# Altium PCB GripperTopBoard.PcbDoc
Units mm, origin at the board's own origin, x right, y up, seen from the top; angles counter-clockwise.
Board outline 79.5 x 85 mm, 2 copper layers (Top Layer, Bottom Layer), stack 1.448 mm thick; 36 components, 15 nets, 87 pads, 103 vias.
Unrouted connection lines stored in the file: 53.
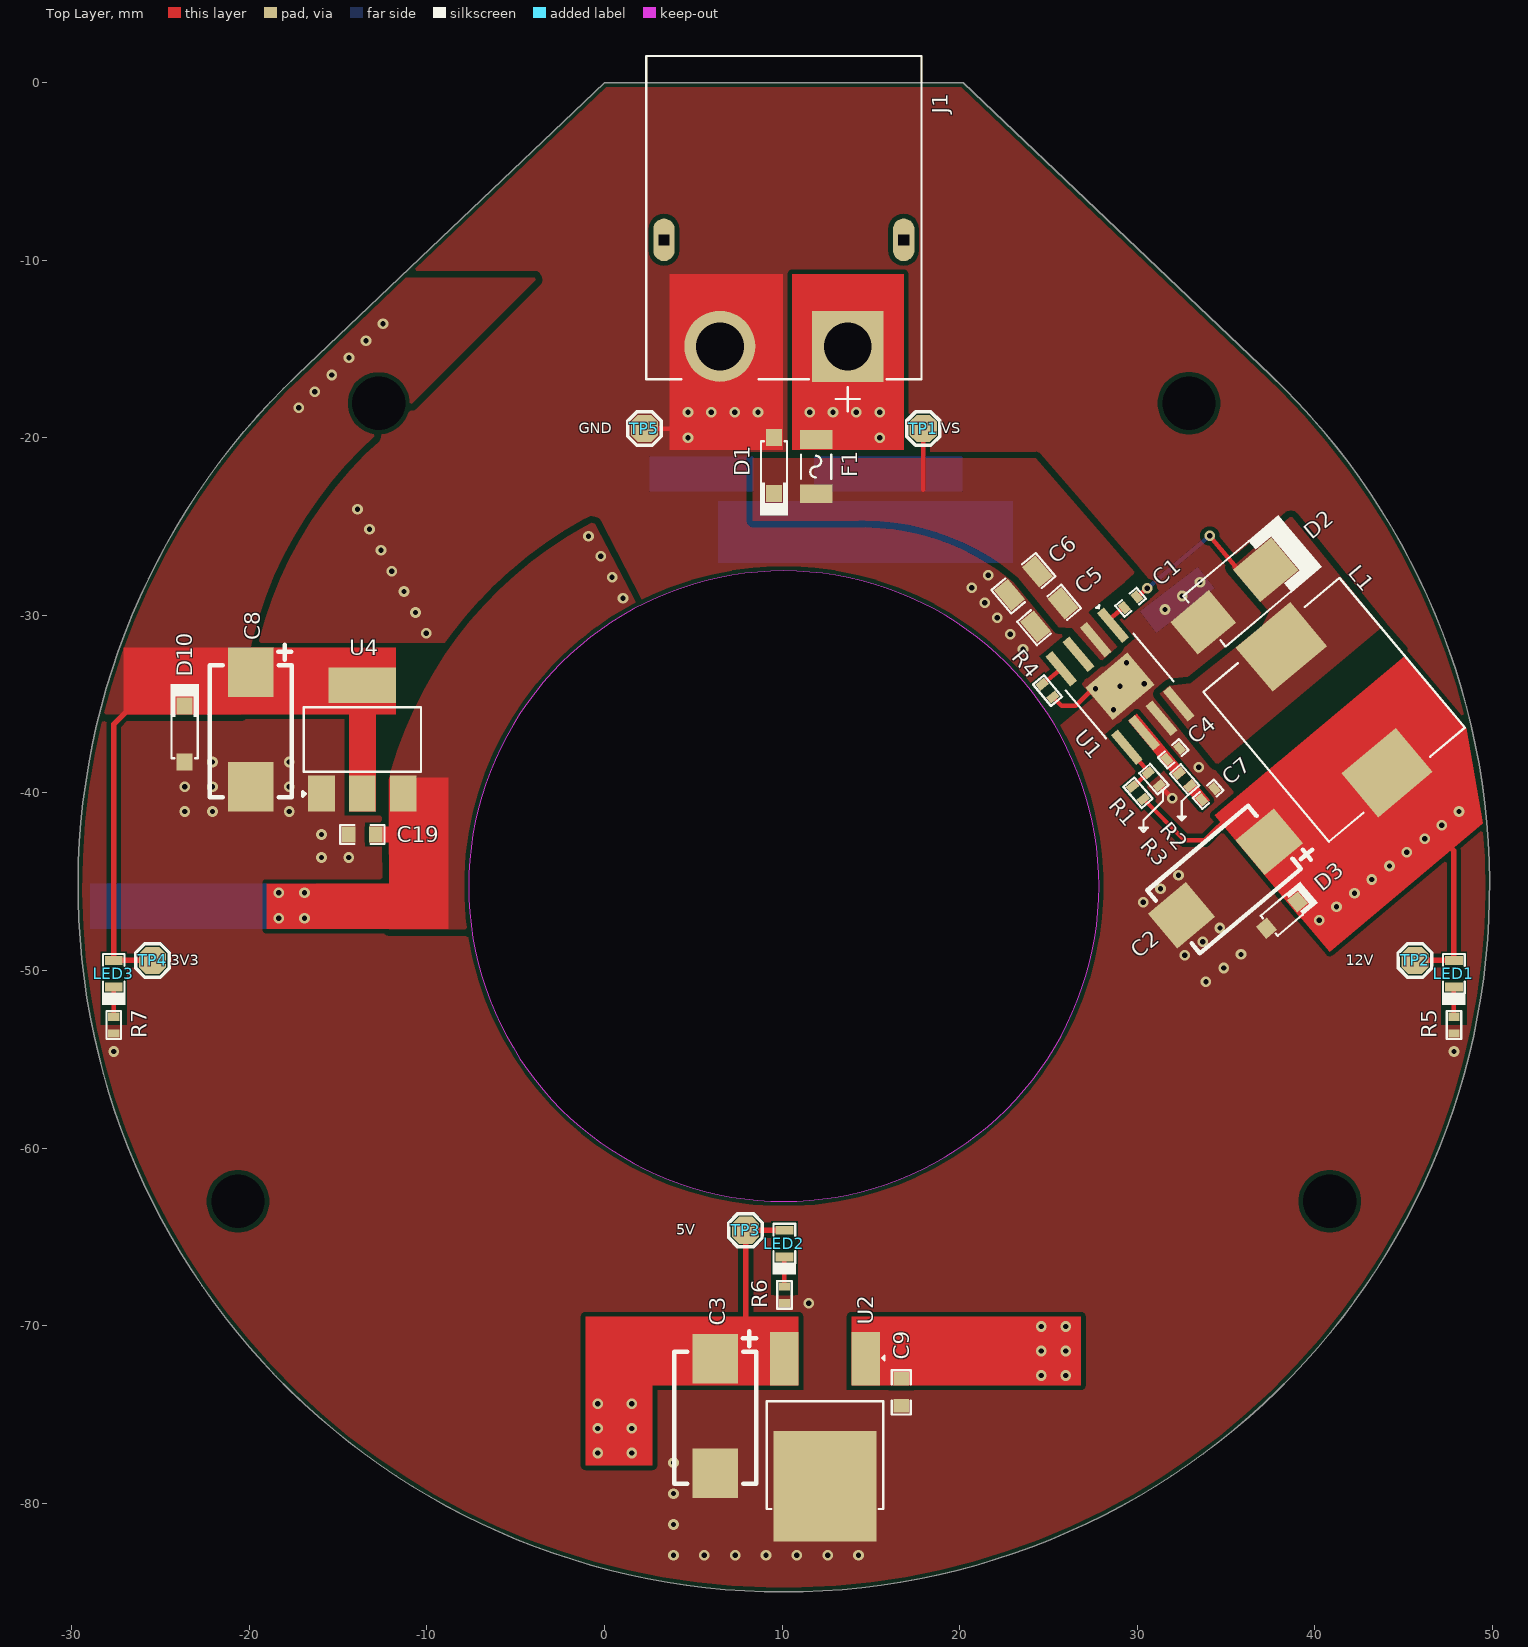
[diagram p0: Top Layer view]
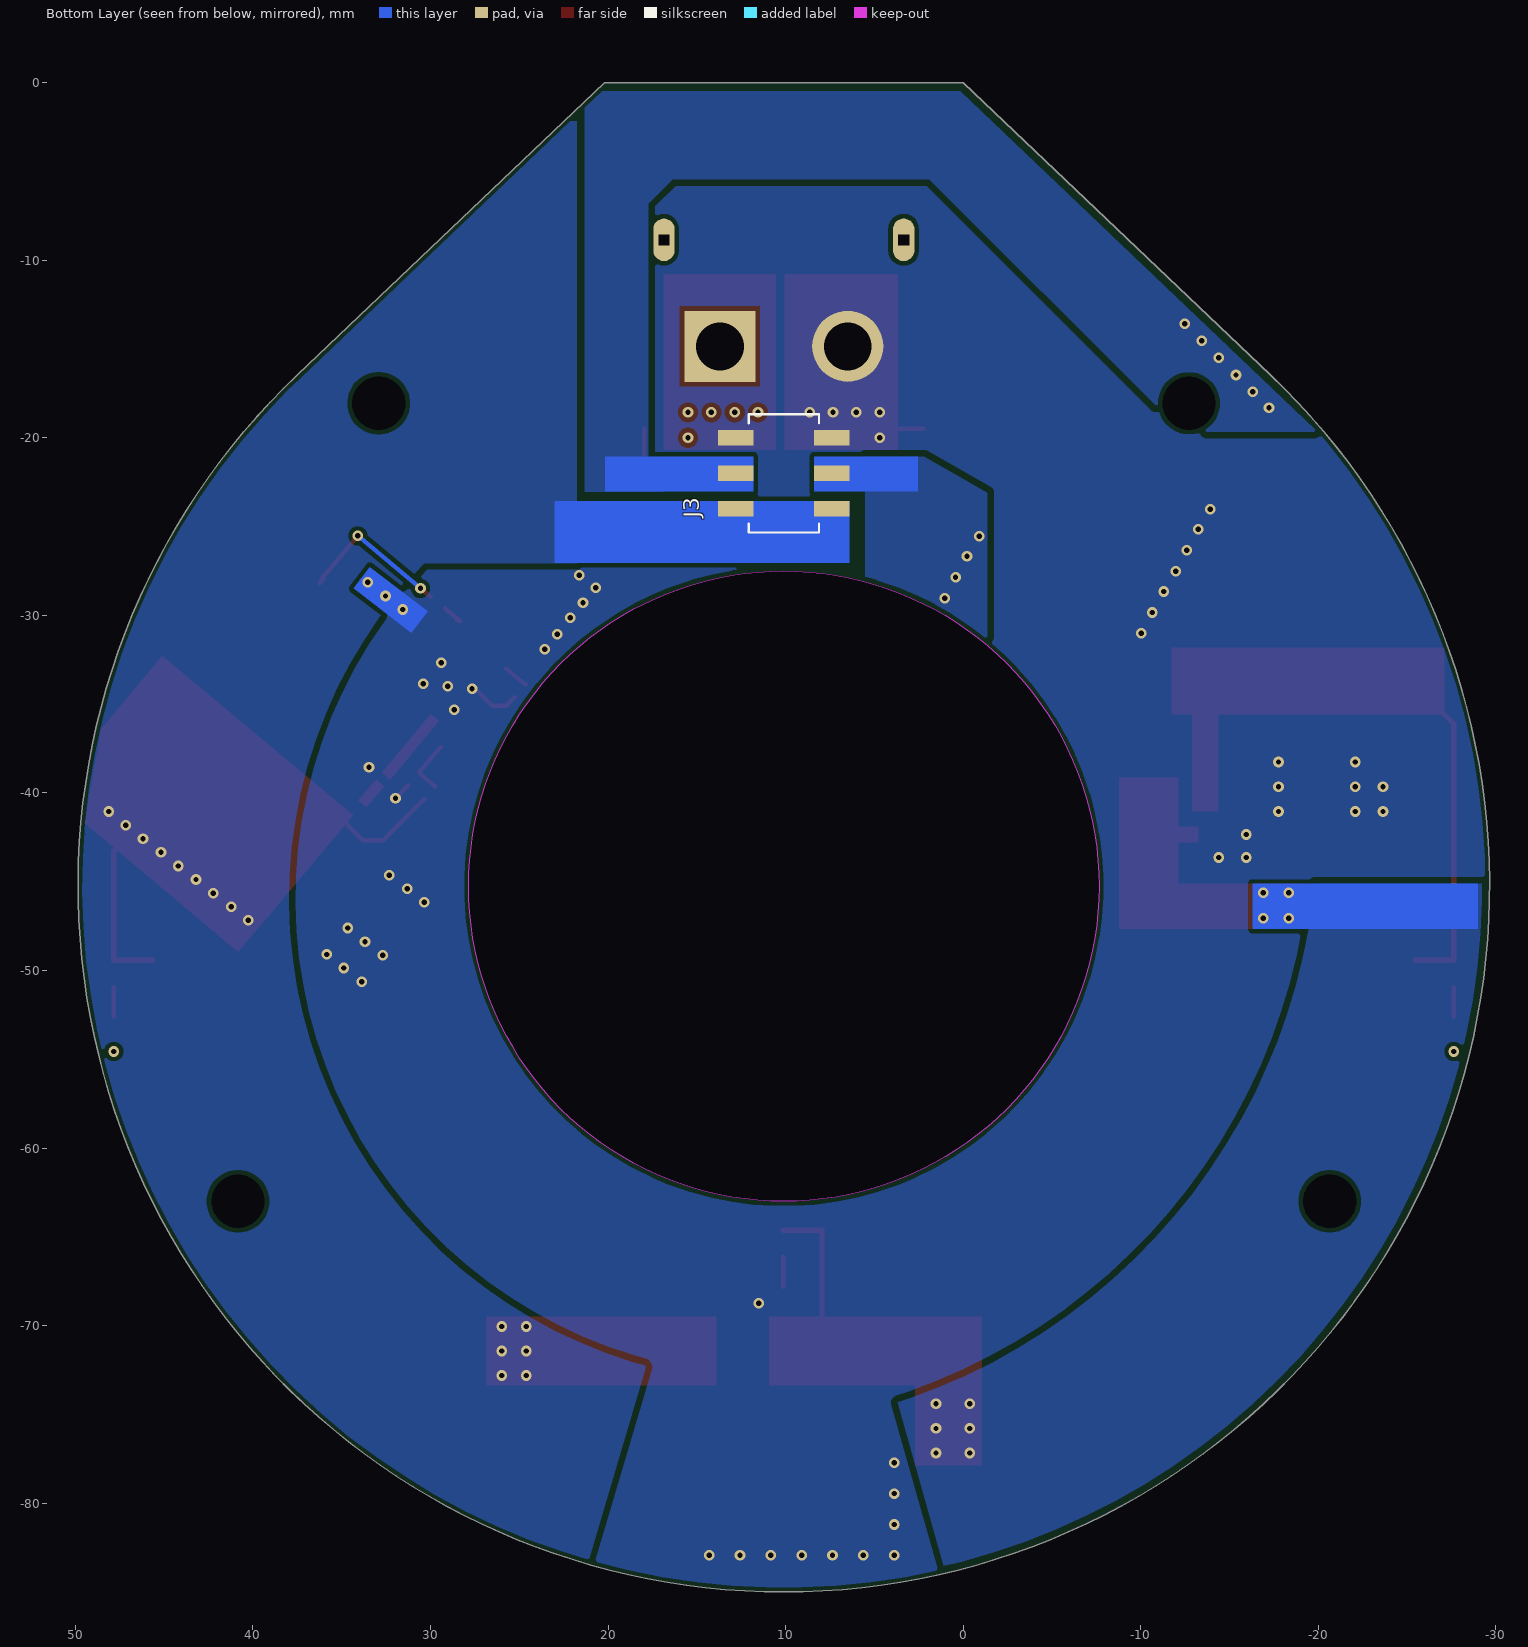
[diagram p1: Bottom Layer view, seen from below]

## Layer stack, top to bottom
Top Solder: solder mask 0.0762, Solder Resist, Dk 3.5
Top Layer: signal copper 0.254
Dielectric 1: core 0.9398, FR-4, Dk 4.8
Bottom Layer: signal copper 0.254
Bottom Solder: solder mask 0.0762, Solder Resist, Dk 3.5

## Board outline
-17.293,-16.446 ccw(c10.101,-45.25) 37.495,-16.446 20.202,0 0,0
cut-out: -7.649,-45.25 ccw(c10.101,-45.25) 10.101,-63 ccw(c10.101,-45.25) 27.851,-45.25 ccw(c10.101,-45.25) 10.101,-27.5 ccw(c10.101,-45.25)

## Design rules (kind name [scope] priority, off if disabled: settings)
BoardOutlineClearance [All] p1: gap=0 ignorepadtopadclearanceinfootprint=FALSE except(0.254: Poly-OutlineEdge)
Clearance [All] p1: gap=0.254 ignorepadtopadclearanceinfootprint=FALSE except(0: Arc-Hole Track-Hole SMDPad-Hole THPad-Hole Via-Hole Fill-Hole Poly-Hole Region-Hole Text-Hole; 0.381: Poly-Poly)
HoleSize [All] p1: absolutevalues=TRUE maxlimit=3 minlimit=0.025 maxpercent=80.000 minpercent=20.000
MinimumSolderMaskSliver [All] p1: minsoldermaskwidth=0
PolygonConnect [All] p1: connectstyle=Direct reliefconductorwidth=0.254 reliefentries=4 polygonreliefangle="90 Angle" airgapwidth=0.254
RoutingVias [All] p1: holewidth=0.3 width=0.6 viastyle="Through Hole" minholewidth=0.3 minwidth=0.6 maxholewidth=0.3 maxwidth=0.6
SilkToSolderMaskClearance [IsPad] p1: minsilkscreentomaskgap=0 clearancetoexposedcopper=TRUE
SolderMaskExpansion [All] p1: expansion=0.102 istentingtop=FALSE
UnRoutedNet [All] p1: checkbadconnections=TRUE
Width [All] p1: maxlimit=0.508 minlimit=0.254 preferedwidth=0.254 minimp=50.000000 maximp=50.000000 favimp=50.000000
26 further rules are at their usual default settings.

## Classes and differential pairs
component class U_Connector-Sheet: C J3

## Components (designator, comment, footprint, x,y, rotation, side; value= is the part's Value field where it differs from the comment)
C1 "100nF" cap-0402 29.627,-29.26 r220 top
C2 "100uF" Case-E 37.438,-42.746 r220 top
C3 "100uF" Case-E 6.248,-71.866 r270 top
C4 "6.8pF" Cap-0402 32.029,-37.793 r221 top
C5 "2.2uF" Cap-0805 25.044,-29.974 r40 top
C6 "2.2uF" Cap-0805 23.597,-28.192 r40 top
C7 "3.3nf" Cap-0402 33.996,-40.075 r221 top
C8 "100uF" Case-E -19.914,-33.209 r270 top
C9 "1uF" Cap-0603 16.713,-73.762 r90 top
C19 "1uF" Cap-0603 -13.64,-42.342 r0 top
D1 "AZ4036-01G" SOD-123 9.549,-21.565 r270 top
D2 "SS510B" SMB_ 35.483,-28.915 r40 top
D3 "SD12LC" SOD-323 38.158,-46.879 r220 top
D10 "AZ3003-01G" SOD-123 -23.647,-36.678 r90 top
F1 "0458005.DR" "Fuse 1206 (3216 Metric)" 11.923,-21.619 r270 top
J1 "XT60PW-M" XT60PW-M 10.101,-11.85 r270 top locked
J3 "DW200S-22-06-43" "HDR2X3 (Female SMD)" 10.101,-22 r0 bottom locked
L1 "CXP1050-220M-AG(22uh)" CXP1050-220M-AG(22uh) 41.096,-35.32 r310 top
LED1 "RED" LED-0603 47.84,-50.182 r270 top
LED2 "RED" LED-0603 10.135,-65.38 r270 top
LED3 "RED" LED-0603 -27.635,-50.182 r270 top
R1 "147K" Res-0402 30.045,-39.99 r311 top value=147kR
R2 "28.7K" Res-0402 32.666,-39.248 r131 top
R3 "10.5K" Res-0402 30.939,-39.222 r131 top
R4 "249K" Res-0402 24.949,-34.238 r130 top
R5 "1K" Res-0402 47.84,-53.073 r270 top
R6 "240R" Res-0402 10.135,-68.27 r270 top
R7 "100R" Res-0402 -27.635,-53.073 r270 top
TP1 "TEST POINT" Test-point 17.952,-19.482 r0 top
TP2 "TEST POINT" Test-point 45.656,-49.432 r0 top
TP3 "TEST POINT" Test-point 7.95,-64.63 r0 top
TP4 "TEST POINT" Test-point -25.451,-49.432 r90 top
TP5 "TEST POINT" Test-point 2.25,-19.482 r0 top
U1 "TPS54560BQDDARQ1" "8-SO PowerPad" 29.032,-33.993 r310 top
U2 "MC7805BDTRKG" DPAK_ 12.42,-75.456 r180 top
U4 "LDL1117S33R" "SOT- 223" -13.64,-36.982 r0 top

## Footprints (in the part's own frame and the unit in brackets; to place one, negate y for a bottom-side part, rotate by r counter-clockwise, add the part's x,y. Pads: shape width x height; smd on the part's side, far side on the other; paste and mask are expansions set on the pad)
"8-SO PowerPad" [mm]
  rect 2.2x0.5 smd mask+0.07: 1(-2.875,1.905) 2(-2.875,0.635) 3(-2.875,-0.635) 4(-2.875,-1.905) 5(2.875,-1.905) 6(2.875,-0.635) 7(2.875,0.635) 8(2.875,1.905)
  rect 2.4x3.1 smd mask+0.07: 9(0,0)
  silkscreen extent -4.24,-2.49 1.73,2.49, body extent -3,-2.45 3,2.45, height 1.7
cap-0402 [mil]
  rect 18x25 smd mask+2.36: 1(-18.5,0) 2(18.5,0)
  silkscreen extent -31,-16 31,16, body extent -20,-10 20,10, height 19
Cap-0402 [mil]
  rect 18x25 smd mask+2.36: 1(-18.5,0) 2(18.5,0)
  silkscreen extent -31,-16 31,16, body extent -20,-10 20,10, height 19
Cap-0603 [mil]
  rect 30x35 smd mask+2.36: 1(-30,0) 2(30,0)
  silkscreen extent -49,-21 49,21, body extent -32,-16 31,16, height 34
Cap-0805 [mil] "SMD 0805"
  rect 40x60 smd mask+2.76: 1(-40,0) 2(40,0)
  silkscreen extent -64,-34 64,34, body extent -39,-25 39,25, height 30
Case-E [mm]
  rect 2.79x2.57 smd: 1(0,0) 2(6.44,0)
  silkscreen extent -1.56,-2.31 7.03,2.31, body extent -0.27,-2.21 6.92,2.21, height 2.88
CXP1050-220M-AG(22uh) [mm]
  rect 3.25x4 smd mask+0.055: 1(-4.625,0) 2(4.625,0)
  silkscreen extent -5.5,-5 5.5,5
DPAK_ [mm]
  rect 1.6x3 smd: 1(-2.285,-3.59) 3(2.285,-3.59)
  rect 5.8x6.2 smd: 2(0,3.59)
  silkscreen extent -3.35,-3.76 3.28,4.88, body extent -3.28,-3.99 3.22,5.92, height 2.51
"Fuse 1206 (3216 Metric)" [mm] "0.126\" L x 0.062\" W x 0.026\" H (3.20mm x 1.58mm x 0.65mm)"
  rect 1.06x1.82 smd: 1(-1.528,0) 2(1.528,0)
  silkscreen extent -0.68,-0.85 0.68,0.85, body extent -1.6,-0.79 1.6,0.79, height 0.85
"HDR2X3 (Female SMD)" [mm]
  rect 2x0.89 smd: 1(-2.7,2) 2(2.7,2) 3(-2.7,0) 4(2.7,0) 5(-2.7,-2) 6(2.7,-2)
  silkscreen extent -1.98,-3.33 1.98,3.33, body extent -3.25,-3.25 3.25,3.25, height 4.7
LED-0603 [mm]
  rect 0.5x1 smd: 1(-0.75,0) 2(0.75,0)
  silkscreen extent -1.12,-0.66 1.75,0.66, body extent -0.82,-0.37 0.82,0.36, height 0.68
Res-0402 [mil]
  rect 18x25 smd mask+2.17: 1(-18.5,0) 2(18.5,0)
  silkscreen extent -32,-17 32,16, body extent -23,-11 23,11, height 16
SMB_ [mm]
  rect 2.8x2.4 smd: 1(-2.3,0) 2(2.3,0)
  silkscreen extent -2.21,-1.91 4.83,1.9, body extent -2.7,-1.8 2.7,1.8, height 2.3
SOD-123 [mm]
  rect 0.95x0.9 smd: 1(-1.575,0) 2(1.575,0)
  silkscreen extent -1.37,-0.8 2.82,0.8, body extent -1.82,-0.78 1.83,0.78, height 1.5
SOD-323 [mm]
  rect 0.8x0.9 smd mask+0.055: 1(-1.15,0) 2(1.15,0)
  silkscreen extent -2.01,-0.79 0.94,0.79, body extent -1.3,-0.67 1.3,0.67, height 1.1
"SOT- 223" [mm]
  rect 1.5x2 smd: 1(-2.3,-3.05) 2(0,-3.05) 3(2.3,-3.05)
  rect 3.8x2 smd: 4(0,3.05)
  silkscreen extent -3.35,-3.2 3.3,1.8, body extent -3.25,-3.5 3.25,3.5, height 1.61
Test-point [mil]
  oct 60x60 smd: 1(0,0)
  silkscreen extent -37,-37 37,37
XT60PW-M [mm]
  rect 4x4 hole 2.7: 1(3,3.6)
  round 4 hole 2.7: 2(3,-3.6)
  oval 2.4x1.2 hole 0.6 square: S1(-3,6.75) S2(-3,-6.75)
  silkscreen extent -13.35,-7.75 6.65,7.75, body extent -13.35,-7.75 4.85,7.75, height 8.4

## Part data
C1: library part C1005X7R1H104KT000F, "CAP CER 0.1UF 50V X7R 0402", Dielectric=X7R, LCSC Part Number=C361198, Manufacturer=TDK, Tolerance=10%, Voltage=25V, Category="Ceramic Capacitors", ComponentLink1Description=LCSC, ComponentLink1URL=https://www.lcsc.com/product-detail/Multilayer-Ceramic-Capacitors-MLCC-SMD-SMT_TDK-C1005X7R1H104KT000F_C361198.html, Item Type=Capacitor, Manufacturer Part Number=C1005X7R1H104KT000F, RoHS=No, Supplier 1=Avnet, Supplier Part Number 1=C1005X7R1H104KT000F
C2 C3 C8: library part TAJE107M025RNJ, "CAP TANT 100UF 20% 25V 2917", Case Code (Imperial)=2917, Case Code (Metric)=7343, ESR (Equivalent Series Resistance)=300mR, LCSC Part Number=C7230, Leakage Current=25uA, Manufacturer="Kyocera AVX", Max Operating Temperature=125°C, Min Operating Temperature=-55°C, Package Quantity=1, Supplier Part Number 1=581-TAJE107M025RNJ, Tolerance=20%, Voltage Rating=25V, Capacitance=100uF, Case/Package=2917, Category="Tantalum Capacitors", ComponentLink1Description=https://datasheet.ciiva.com/26787/taje107m025rnj-26787048.pdf?src-supplier=IIIC, ComponentLink1URL=https://datasheet.ciiva.com/26787/taje107m025rnj-26787048.pdf?src-supplier=IIIC, ComponentLink2Description=https://datasheet.ciiva.com/265/taj-265541.pdf?src-supplier=Digi-Key, ComponentLink2URL=https://datasheet.ciiva.com/265/taj-265541.pdf?src-supplier=Digi-Key, ComponentLink3Description=https://datasheet.ciiva.com/265/taj-265542.pdf?src-supplier=Digi-Key, ComponentLink3URL=https://datasheet.ciiva.com/265/taj-265542.pdf?src-supplier=Digi-Key, ComponentLink4Description=https://datasheet.ciiva.com/265/taj-265540.pdf?src-supplier=Digi-Key, ComponentLink4URL=https://datasheet.ciiva.com/265/taj-265540.pdf?src-supplier=Digi-Key, ComponentLink5Description=https://datasheet.ciiva.com/28609/1719052-28609254.pdf?src-supplier=Element14, ComponentLink5URL=https://datasheet.ciiva.com/28609/1719052-28609254.pdf?src-supplier=Element14, ComponentLink6Description=https://datasheet.ciiva.com/11230/taj-11230456.pdf?src-supplier=Avnet, ComponentLink6URL=https://datasheet.ciiva.com/11230/taj-11230456.pdf?src-supplier=Avnet, ComponentLink7Description=https://datasheet.ciiva.com/17339/taj-17339677.pdf?src-supplier=Avnet+Europe, ComponentLink7URL=https://datasheet.ciiva.com/17339/taj-17339677.pdf?src-supplier=Avnet+Europe, ComponentLink8Description=https://datasheet.ciiva.com/22667/1719052-22667581.pdf?src-supplier=Element14, ComponentLink8URL=https://datasheet.ciiva.com/22667/1719052-22667581.pdf?src-supplier=Element14, Construction=Flat, Depth=4.3mm, Dissipation Factor=10%, Features="General Purpose", Height=4.3mm, Height - Seated (Max)=0.169inch, Lead Free="Lead Free", Length=7.3mm, Manufacturer Part Number=TAJE107M025RNJ, Mount="Surface Mount", Number of Pins=2, Packaging="Tape and Reel", Polarity=Polar, Pricing 1="1=2.81000, 10=2.81000, 50=2.81000, 100=2.19000, 1000=1.76000, 10000=1.76000 (USD)", Radiation Hardening=No, REACH SVHC="No SVHC", RoHS=Yes, RoHS Compliant=Yes, Series=TAJ, Stock 1=109, Supplier 1=Mouser, Termination=SMD/SMT, Voltage Rating (DC)=25V, Width=4.3mm
C4: library part CC0402CRNPO9BN6R8, "CAP CER 6.8PF 50V C0G/NPO 0402", Case Code (Imperial)=0402, Case Code (Metric)=1005, Dielectric=C0G, Insulation Resistance=10GR, LCSC Part Number=C189470, Manufacturer=Yageo, Max Operating Temperature=125°C, Min Operating Temperature=-55°C, Supplier Part Number=3247368, Tolerance=2%, Voltage Rating=50V, Case/Package=0402, Category="Ceramic Capacitors", ComponentLink1Description=https://datasheet.ciiva.com/11587/upy-gp-np0-16v-to-50v-8-11587182.pdf?src-supplier=Avnet, ComponentLink1URL=https://datasheet.ciiva.com/11587/upy-gp-np0-16v-to-50v-8-11587182.pdf?src-supplier=Avnet, Construction=Flat, Depth=0.5mm, Height=0.5mm, Item Type=Capacitor, Length=1mm, Manufacturer Part Number=CC0402CRNPO9BN6R8, Mounting Technology="Surface Mount", Packaging="Tape and Reel", Pricing="10000=0.0024, 40000=0.0022, 150000=0.0021, 400000=0.002, 1000000=0.0019 (USD)", Radiation Hardening=No, RoHS=Yes, RoHS Compliant=Yes, Series=CC, Stock=200000, Supplier="Future Electronics", Termination=SMD/SMT, Voltage Rating (DC)=50V, Weight=2.3E-05oz, Width=0.5mm
C5 C6: library part GRM21BD72A225KE01L, "CAP CER 2.2UF 100V X7T 0805", LCSC Part Number=C2981733, Manufacturer=Murata, Supplier Part Number 1=490-GRM21BD72A225KE01LCT-ND, Category="Ceramic Capacitors", ComponentLink1Description=LCSC, ComponentLink1URL=https://www.lcsc.com/product-detail/Multilayer-Ceramic-Capacitors-MLCC-SMD-SMT_Murata-Electronics-GRM21BD72A225KE01L_C2981733.html, Item Type=Capacitor, Manufacturer Part Number=GRM21BD72A225KE01L, Pricing 1="1=0.55000, 10=0.38600, 50=0.29220, 100=0.25440, 500=0.18846, 1000=0.16020 (USD)", RoHS=No, RoHS Compliant=Yes, Stock 1=2439, Supplier 1=Digi-Key
C7: library part CC0402KRX7R9BB332, "CAP CER 3.3nF 50V X7R 0402", Capacitance=3.3nF, Case Code (Imperial)=0402, Case Code (Metric)=1005, Dielectric=X7R, Dielectric Material=Ceramic, Insulation Resistance=100GR, LCSC Part Number=C107028, Manufacturer=Yageo, Max Operating Temperature=125°C, Min Operating Temperature=-55°C, Package Quantity=1, Supplier Part Number 1=9776550, Tolerance=10%, Voltage=50V, Case/Package=0402, Category="Ceramic Capacitors", ComponentLink1Description=https://datasheet.ciiva.com/144/mlccorderingcode-144014.pdf?src-supplier=Digi-Key, ComponentLink1URL=https://datasheet.ciiva.com/144/mlccorderingcode-144014.pdf?src-supplier=Digi-Key, ComponentLink2Description=https://datasheet.ciiva.com/144/mlccorderingcode-144013.pdf?src-supplier=Digi-Key, ComponentLink2URL=https://datasheet.ciiva.com/144/mlccorderingcode-144013.pdf?src-supplier=Digi-Key, ComponentLink3Description=https://datasheet.ciiva.com/144/mlccorderingcode-144015.pdf?src-supplier=Digi-Key, ComponentLink3URL=https://datasheet.ciiva.com/144/mlccorderingcode-144015.pdf?src-supplier=Digi-Key, ComponentLink4Description=https://datasheet.ciiva.com/11786/0900766b80d84f1d-11786153.pdf?src-supplier=Rs, ComponentLink4URL=https://datasheet.ciiva.com/11786/0900766b80d84f1d-11786153.pdf?src-supplier=Rs, ComponentLink5Description=https://datasheet.ciiva.com/7978/1489800-7978103.pdf?src-supplier=Element14, ComponentLink5URL=https://datasheet.ciiva.com/7978/1489800-7978103.pdf?src-supplier=Element14, ComponentLink6Description=https://datasheet.ciiva.com/28450/1489800-28450409.pdf?src-supplier=Element14, ComponentLink6URL=https://datasheet.ciiva.com/28450/1489800-28450409.pdf?src-supplier=Element14, ComponentLink7Description=https://datasheet.ciiva.com/5789/1489800-5789558.pdf?src-supplier=Farnell, ComponentLink7URL=https://datasheet.ciiva.com/5789/1489800-5789558.pdf?src-supplier=Farnell, ComponentLink8Description=https://datasheet.ciiva.com/8033/1489800-8033630.pdf?src-supplier=Element14, ComponentLink8URL=https://datasheet.ciiva.com/8033/1489800-8033630.pdf?src-supplier=Element14, ComponentLink9Description=https://datasheet.ciiva.com/22745/1489800-22745767.pdf?src-supplier=Element14, ComponentLink9URL=https://datasheet.ciiva.com/22745/1489800-22745767.pdf?src-supplier=Element14, ComponentLink10Description=https://datasheet.ciiva.com/5425/upy-gphc-x7r-6-3v-to-50v-8-12304-5425518.pdf?src-supplier=Mouser, ComponentLink10URL=https://datasheet.ciiva.com/5425/upy-gphc-x7r-6-3v-to-50v-8-12304-5425518.pdf?src-supplier=Mouser, ComponentLink11Description=https://datasheet.ciiva.com/11586/upy-gphc-x7r-6-3v-to-50v-8-11586486.pdf?src-supplier=Avnet, ComponentLink11URL=https://datasheet.ciiva.com/11586/upy-gphc-x7r-6-3v-to-50v-8-11586486.pdf?src-supplier=Avnet, ComponentLink12Description=https://datasheet.ciiva.com/15189/getdatasheetpartid-315557-15189133.pdf?src-supplier=Verical, ComponentLink12URL=https://datasheet.ciiva.com/15189/getdatasheetpartid-315557-15189133.pdf?src-supplier=Verical, Depth=0.5mm, Halogen Free="Halogen Free", Height=0.5mm, Item Type=Capacitor, Lead Free="Lead Free", Length=1mm, Manufacturer Part Number=CC0402KRX7R9BB332, Mount="Surface Mount", Number of Pins=2, Packaging="Tape and Reel", Pricing 1="10000=0.00230, 40000=0.00200, 50000=0.00220, 150000=0.00190, 250000=0.00200, 400000=0.00180, 1000000=0.00190, 2500000=0.00180 (USD)", Radiation Hardening=No, Reach SVHC Compliant=Yes, RoHS=Yes, RoHS Compliant=Yes, Series=CC, Stock 1=1190000, Supplier 1="Future Electronics", Terminal Length=0.225mm, Termination=SMD/SMT, Thickness=0.022inch, Voltage Rating=50V, Voltage Rating (DC)=50V, Width=0.02inch
C9 C19: library part CC0603KRX5R8BB105, "CAP CER 1UF 25V X5R 0603", Case Code (Imperial)=0603, Case Code (Metric)=1608, Dielectric=X5R, LCSC Part Number=C14664, Manufacturer=Yageo, Max Operating Temperature=85°C, Min Operating Temperature=-55°C, Package Quantity=1, Supplier Part Number 1=311-1445-1-ND, Tolerance=10%, Voltage Rating=25V, Capacitance=1uF, Case/Package=0603, Category="Ceramic Capacitors", ComponentLink1Description=https://datasheet.ciiva.com/176/mlccorderingcode-176785.pdf?src-supplier=Digi-Key, ComponentLink1URL=https://datasheet.ciiva.com/176/mlccorderingcode-176785.pdf?src-supplier=Digi-Key, ComponentLink2Description=https://datasheet.ciiva.com/176/mlccorderingcode-176786.pdf?src-supplier=Digi-Key, ComponentLink2URL=https://datasheet.ciiva.com/176/mlccorderingcode-176786.pdf?src-supplier=Digi-Key, ComponentLink3Description=https://datasheet.ciiva.com/176/mlccorderingcode-176787.pdf?src-supplier=Digi-Key, ComponentLink3URL=https://datasheet.ciiva.com/176/mlccorderingcode-176787.pdf?src-supplier=Digi-Key, ComponentLink4Description=https://datasheet.ciiva.com/17436/upy-gphc-x5r-4v-to-50v-12-17436952.pdf?src-supplier=Avnet+Europe, ComponentLink4URL=https://datasheet.ciiva.com/17436/upy-gphc-x5r-4v-to-50v-12-17436952.pdf?src-supplier=Avnet+Europe, ComponentLink5Description=https://datasheet.ciiva.com/7978/1525783-7978171.pdf?src-supplier=Element14, ComponentLink5URL=https://datasheet.ciiva.com/7978/1525783-7978171.pdf?src-supplier=Element14, ComponentLink6Description=https://datasheet.ciiva.com/11586/upy-gphc-x5r-4v-to-50v-12-11586318.pdf?src-supplier=Avnet, ComponentLink6URL=https://datasheet.ciiva.com/11586/upy-gphc-x5r-4v-to-50v-12-11586318.pdf?src-supplier=Avnet, Construction=Flat, Depth=0.8mm, Halogen Free="Halogen Free", Height=0.8mm, Item Type=Capacitor, Lead Free="Lead Free", Length=1.6mm, Manufacturer Part Number=CC0603KRX5R8BB105, Mount="Surface Mount", Number of Pins=2, Packaging="Tape and Reel", Pricing 1="1=0.12000, 10=0.08400, 50=0.04760, 100=0.03940, 500=0.02764, 1000=0.02288 (USD)", Radiation Hardening=No, REACH SVHC="No SVHC", RoHS=Yes, RoHS Compliant=Yes, Series=CC, Stock 1=919939, Supplier 1=Digi-Key, Termination=SMD/SMT, Thickness=0.035inch, Voltage Rating (DC)=25V, Width=0.031inch
D1: "Clamp Ipp Tvs Diode Surface Mount SOD-123", LCSC Part Number=-, Manufacturer=Amazing, Package=SOD-123, ComponentLink1Description=Digikey, ComponentLink1URL=https://www.digikey.com/en/products/detail/amazing/AZ4036-01G/16615419, Item Type=Diode, Manufacturer Part Number=AZ4036-01G
D2: "SCHOTTKY DIODE SMB 100V 5A", LCSC Part Number=C3011128, Manufacturer=MDD, Package=SMB, ComponentLink1Description=LCSC, ComponentLink1URL=https://www.lcsc.com/product-detail/Schottky-Barrier-Diodes-SBD_JUXING-SS510B_C3011128.html, Item Type=Diode, Manufacturer Part Number=SS510B
D3: "TVS DIODE 12VWM 28.6VC SOD323", Manufacturer="Sangdest Microelectronics", Supplier Part Number=1655-SD12LCCT-ND, Item Type=Diode, Manufacturer Part Number=SD12LC, Pricing="1=0.43, 10=0.305, 100=0.1541, 500=0.13654, 1000=0.10625 (USD)", Stock=575, Supplier=DigiKey
D10: "TVS SURGE PROTECTOR 1-CH 3.3V", LCSC Part Number=-, Manufacturer=Amazing, Package=SOD-123, ComponentLink1Description=Digikey, ComponentLink1URL=https://www.digikey.com/en/products/detail/amazing/AZ3003-01G/16615352?s=N4IgTCBcDaIIIC0DMAGFSC0KCMBxEAugL5A, Item Type=Diode, Manufacturer Part Number=AZ3003-01G
F1: "FUSE BRD MNT 5A 32VAC 75VDC 1206", LCSC Part Number=C187561, Manufacturer=Littelfuse, Supplier Part Number=1740294, Category=Fuses, ComponentLink1Description=https://datasheet.ciiva.com/1730/337915-1730547.pdf?src-supplier=Newark, ComponentLink1URL=https://datasheet.ciiva.com/1730/337915-1730547.pdf?src-supplier=Newark, ComponentLink2Description=https://datasheet.ciiva.com/7991/337915-7991910.pdf?src-supplier=Element14, ComponentLink2URL=https://datasheet.ciiva.com/7991/337915-7991910.pdf?src-supplier=Element14, ComponentLink3Description=https://datasheet.ciiva.com/299/littelfuse-fuse-458-series-299786.pdf?src-supplier=Digikey, ComponentLink3URL=https://datasheet.ciiva.com/299/littelfuse-fuse-458-series-299786.pdf?src-supplier=Digikey, ComponentLink4Description=https://datasheet.ciiva.com/299/littelfuse-fuse-458-series-299787.pdf?src-supplier=Digikey, ComponentLink4URL=https://datasheet.ciiva.com/299/littelfuse-fuse-458-series-299787.pdf?src-supplier=Digikey, ComponentLink5Description=https://datasheet.ciiva.com/299/littelfuse-fuse-458-series-299788.pdf?src-supplier=Digikey, ComponentLink5URL=https://datasheet.ciiva.com/299/littelfuse-fuse-458-series-299788.pdf?src-supplier=Digikey, Item Type=Fuse, Manufacturer Part Number=0458005.DR, Pricing="1=0.6241, 10=0.73892, 25=0.71895, 50=0.70003 (GBP)", RoHS=Yes, Stock=1005, Supplier=Rs
J1: "Power Connectors ROHS", LCSC Part Number=C98732, Manufacturer="Changzhou Amass Elec", Package=Custom, ComponentLink1Description=LCSC, ComponentLink1URL=https://jlcpcb.com/partdetail/Changzhou_AmassElec-XT60PWM/C98732, Item Type=Connector, Manufacturer Part Number=XT60PW-M
J3: "2mm 双排 6P Brick nogging 2x3P SMD,P=2mm Female Headers ROHS", LCSC Part Number=C5160809, Manufacturer=DEALON, Package=SMD,P=2mm, ComponentLink1Description=LCSC, ComponentLink1URL=https://www.lcsc.com/product-detail/span-style-background-color-ff0-Female-span-Headers_DEALON-DW200S-22-06-43_C5160809.html, Item Type="Female Header", Manufacturer Part Number=DW200S-22-06-43
L1: "5.5A 22uH Molding Choke ±20% 8A 1050 Power Inductors ROHS", LCSC Part Number=C7461393, Manufacturer=DMBJ, Package=1050, ComponentLink1Description=LCSC, ComponentLink1URL=https://www.lcsc.com/product-detail/Power-Inductors_DMBJ-CXP1050-220M-AG-22uh_C7461393.html, Item Type=Inductor, Manufacturer Part Number=CXP1050-220M-AG(22uh)
LED1 LED2 LED3: library part NCD0603R3, "RED LED 0603 Light Emitting Diodes", LCSC Part Number=C3151730, Manufacturer="Foshan NationStar Optoelectronics", Package=0603, ComponentLink1Description=LCSC, ComponentLink1URL=https://www.lcsc.com/product-detail/Light-Emitting-Diodes-LED_Foshan-NationStar-Optoelectronics-NCD0603R3_C3151730.html, Item Type=LED, Manufacturer Part Number=NCD0603R3
R1: library part RC0402FR-07147KL, "RES 147K OHM 1% 1/16W 0402", Case Code (Imperial)=0402, Case Code (Metric)=1005, LCSC Part Number=C163489, Manufacturer=Yageo, Max Operating Temperature=155°C, Max Power Dissipation=63mW, Min Operating Temperature=-55°C, Power Rating=62.5mW, Supplier Part Number=1233261, Temperature Coefficient=100ppm/°C, Tolerance=1%, Voltage Rating=50V, Case/Package=0402, Construction=Rectangular, Depth=0.5mm, Features="Moisture Resistant", Height=0.016inch, Item Type=Resistors, Lead Free=5697LeadFree, Length=1mm, Manufacturer Part Number=RC0402FR-07147KL, Military Standard=Not, Number of Terminations=2, Packaging="Tape and Reel", Pricing="10000=0.0012, 100000=0.0011, 300000=0.001, 750000=0.001, 2000000=0.0009 (USD)", RoHS=Yes, RoHS Compliant=Yes, Series=RC, Stock=30000, Supplier="Future Electronics", Termination=SMD/SMT, Voltage Rating (DC)=50V, Width=0.5mm
R2: library part NQ02WGF2872TCE, "62.5mW 100V ±1% 28.7kΩ 0402 Chip Resistor - Surface Mount ROHS", LCSC Part Number=C2779810, Manufacturer="Royal Ohm", Supplier Part Number=303-NQ02WGF2872TCE, Item Type=Resistor, Manufacturer Part Number=NQ02WGF2872TCE, Pricing="10000=0.002 (USD)", Supplier=Mouser
R3: library part CRCW040210K5FKED, "RES SMD 10.5K OHM 1% 1/16W 0402", LCSC Part Number=C481924, Manufacturer=Vishay, Supplier Part Number=71-CRCW0402-10.5K-E3, Voltage Rating (DC)=50V, ComponentLink1Description=https://datasheet.ciiva.com/11817/0900766b80d98824-11817996.pdf?src-supplier=Rs, ComponentLink1URL=https://datasheet.ciiva.com/11817/0900766b80d98824-11817996.pdf?src-supplier=Rs, ComponentLink2Description=https://datasheet.ciiva.com/3255/dcrcwe3-3255967.pdf?src-supplier=Avnet, ComponentLink2URL=https://datasheet.ciiva.com/3255/dcrcwe3-3255967.pdf?src-supplier=Avnet, ComponentLink3Description=https://datasheet.ciiva.com/22700/1697337-22700669.pdf?src-supplier=Element14, ComponentLink3URL=https://datasheet.ciiva.com/22700/1697337-22700669.pdf?src-supplier=Element14, ComponentLink4Description=https://datasheet.ciiva.com/2463/dcrcwe3-2463739.pdf?src-supplier=Digikey, ComponentLink4URL=https://datasheet.ciiva.com/2463/dcrcwe3-2463739.pdf?src-supplier=Digikey, ComponentLink5Description=https://datasheet.ciiva.com/2463/dcrcwe3-2463740.pdf?src-supplier=Digikey, ComponentLink5URL=https://datasheet.ciiva.com/2463/dcrcwe3-2463740.pdf?src-supplier=Digikey, ComponentLink6Description=https://datasheet.ciiva.com/2463/dcrcwe3-2463741.pdf?src-supplier=Digikey, ComponentLink6URL=https://datasheet.ciiva.com/2463/dcrcwe3-2463741.pdf?src-supplier=Digikey, ComponentLink7Description=https://datasheet.ciiva.com/7743/125364-7743419.pdf?src-supplier=Element14, ComponentLink7URL=https://datasheet.ciiva.com/7743/125364-7743419.pdf?src-supplier=Element14, ComponentLink8Description=https://datasheet.ciiva.com/7663/1697337-7663816.pdf?src-supplier=Element14, ComponentLink8URL=https://datasheet.ciiva.com/7663/1697337-7663816.pdf?src-supplier=Element14, ComponentLink9Description=https://datasheet.ciiva.com/7663/1697337-7663817.pdf?src-supplier=Element14, ComponentLink9URL=https://datasheet.ciiva.com/7663/1697337-7663817.pdf?src-supplier=Element14, ComponentLink10Description=https://datasheet.ciiva.com/16394/dcrcwe3-16394264.pdf?src-supplier=Future+Electronics, ComponentLink10URL=https://datasheet.ciiva.com/16394/dcrcwe3-16394264.pdf?src-supplier=Future+Electronics, ComponentLink11Description=https://datasheet.ciiva.com/16777/70201119-16777227.pdf?src-supplier=Allied+Electronics, ComponentLink11URL=https://datasheet.ciiva.com/16777/70201119-16777227.pdf?src-supplier=Allied+Electronics, Item Type=Resistors, Lead Free=5697LeadFree, Manufacturer Part Number=CRCW040210K5FKED, Pricing="1=0.1, 10=0.017, 50=0.017, 100=0.01, 1000=0.007, 10000=0.004 (USD)", RoHS=Yes, Stock=26970, Supplier=Mouser
R4: library part 0402WGF2493TCE, "62.5mW Thick Film Resistors 50V ±100ppm/℃ ±1% 249kΩ 0402 Chip Resistor - Surface Mount ROHS", LCSC Part Number=C11425, Manufacturer="Royal Electronic Factory", Supplier Part Number=303-0402WGF2493TCE, Item Type=Resistor, Manufacturer Part Number=0402WGF2493TCE, Pricing="10000=0.004 (USD)", RoHS=No, Supplier=Mouser
R5: library part RC0402FR-071KL, "RES 1K OHM 1% 1/16W 0402", Case Code (Imperial)=0402, Case Code (Metric)=1005, LCSC Part Number=C106235, Manufacturer=Yageo, Max Operating Temperature=155°C, Max Power Dissipation=63mW, Min Operating Temperature=-55°C, Power Rating=62.5mW, Resistance=1kR, Resistance Tolerance=1%, Resistor Type="Thick Film", Temperature Coefficient=100ppm/°C, Voltage Rating=50V, Case/Package=0402, Category="Chip SMD Resistors", ComponentLink1Description=https://datasheet.ciiva.com/11819/0900766b80c66297-11819477.pdf?src-supplier=RSComponents, ComponentLink1URL=https://datasheet.ciiva.com/11819/0900766b80c66297-11819477.pdf?src-supplier=RSComponents, ComponentLink2Description=https://datasheet.ciiva.com/7983/1018594-7983502.pdf?src-supplier=Element14, ComponentLink2URL=https://datasheet.ciiva.com/7983/1018594-7983502.pdf?src-supplier=Element14, ComponentLink3Description=https://datasheet.ciiva.com/22747/1018594-22747513.pdf?src-supplier=Element14, ComponentLink3URL=https://datasheet.ciiva.com/22747/1018594-22747513.pdf?src-supplier=Element14, ComponentLink4Description=https://datasheet.ciiva.com/12666/pyu-rc0402-51-rohs-l-6-r-12666741.pdf?src-supplier=Mouser, ComponentLink4URL=https://datasheet.ciiva.com/12666/pyu-rc0402-51-rohs-l-6-r-12666741.pdf?src-supplier=Mouser, ComponentLink5Description=https://datasheet.ciiva.com/7849/1018594-7849869.pdf?src-supplier=Element14, ComponentLink5URL=https://datasheet.ciiva.com/7849/1018594-7849869.pdf?src-supplier=Element14, ComponentLink6Description=https://datasheet.ciiva.com/7849/1018594-7849871.pdf?src-supplier=Element14, ComponentLink6URL=https://datasheet.ciiva.com/7849/1018594-7849871.pdf?src-supplier=Element14, ComponentLink7Description=https://datasheet.ciiva.com/17063/pyu-rc0402-51-rohs-l-6-r-17063193.pdf?src-supplier=Future+Electronics, ComponentLink7URL=https://datasheet.ciiva.com/17063/pyu-rc0402-51-rohs-l-6-r-17063193.pdf?src-supplier=Future+Electronics, Construction=Rectangular, Depth=0.5mm, Features="Moisture Resistant", Height=0.32mm, Item Type=Resistor, Lead Free="Lead Free", Length=1mm, Manufacturer Part Number=RC0402FR-071KL, Military Standard=Not, Number of Pins=2, Number of Terminations=2, Packaging="Tape and Reel", Pricing 1="10000=0.00085, 20000=0.00087, 40000=0.00084, 60000=0.00083, 80000=0.00079, 100000=0.00078, 1000000=0.00076 (USD)", Reach SVHC Compliant=Yes, RoHS=Yes, RoHS Compliant=Yes, Series=RC, Size Code=0402, Stock 1=13030000, Supplier 1=Avnet, Supplier Part Number 1=RC0402FR-071KL, Technology="THICK FILM", Termination=SMD/SMT, Tolerance=1%, Voltage Rating (DC)=50V, Width=0.5mm
R6: library part RC0402FR-07240RL, "RES 240 OHM 1% 1/16W 0402", Case Code (Imperial)=0402, Case Code (Metric)=1005, Manufacturer=Yageo, Max Operating Temperature=155°C, Max Power Dissipation=63mW, Min Operating Temperature=-55°C, Package Quantity=1, Resistance Tolerance=1%, Resistor Type="Thick Film", Supplier Part Number 1=603-RC0402FR-07240RL, Temperature Coefficient=100ppm/°C, Voltage Rating=50V, Case/Package=0402, Category="Chip SMD Resistors", ComponentLink1Description=https://datasheet.ciiva.com/7849/1018594-7849915.pdf?src-supplier=Element14, ComponentLink1URL=https://datasheet.ciiva.com/7849/1018594-7849915.pdf?src-supplier=Element14, ComponentLink2Description=https://datasheet.ciiva.com/7849/1018594-7849916.pdf?src-supplier=Element14, ComponentLink2URL=https://datasheet.ciiva.com/7849/1018594-7849916.pdf?src-supplier=Element14, ComponentLink3Description=https://datasheet.ciiva.com/2519/pyu-r-int-thick-7-2519157.pdf?src-supplier=Digi-Key, ComponentLink3URL=https://datasheet.ciiva.com/2519/pyu-r-int-thick-7-2519157.pdf?src-supplier=Digi-Key, ComponentLink4Description=https://datasheet.ciiva.com/2519/pyu-r-int-thick-7-2519158.pdf?src-supplier=Digi-Key, ComponentLink4URL=https://datasheet.ciiva.com/2519/pyu-r-int-thick-7-2519158.pdf?src-supplier=Digi-Key, ComponentLink5Description=https://datasheet.ciiva.com/2519/pyu-r-int-thick-7-2519156.pdf?src-supplier=Digi-Key, ComponentLink5URL=https://datasheet.ciiva.com/2519/pyu-r-int-thick-7-2519156.pdf?src-supplier=Digi-Key, ComponentLink6Description=https://datasheet.ciiva.com/12669/pyu-rc0402-51-rohs-l-6-r-12669689.pdf?src-supplier=Mouser, ComponentLink6URL=https://datasheet.ciiva.com/12669/pyu-rc0402-51-rohs-l-6-r-12669689.pdf?src-supplier=Mouser, ComponentLink7Description=https://datasheet.ciiva.com/17419/pyu-rc0402-51-rohs-l-6-r-17419482.pdf?src-supplier=Future+Electronics, ComponentLink7URL=https://datasheet.ciiva.com/17419/pyu-rc0402-51-rohs-l-6-r-17419482.pdf?src-supplier=Future+Electronics, Construction=Rectangular, Depth=0.5mm, Features="Moisture Resistant", Height=0.016inch, Lead Free="Lead Free", Length=1mm, Manufacturer Part Number=RC0402FR-07240RL, Military Standard=Not, Number of Terminations=2, Packaging="Tape and Reel", Power Rating=63mW, Pricing 1="1=0.10000, 10=0.01200, 50=0.01200, 100=0.00500, 1000=0.00300, 10000=0.00100 (USD)", REACH SVHC=Unknown, Resistance=240R, RoHS=Yes, RoHS Compliant=Yes, Series=RC, Size Code=0402, Stock 1=1903202, Supplier 1=Mouser, Termination=SMD/SMT, Tolerance=1%, Voltage Rating (DC)=50V, Width=0.02inch
R7: library part RC0402FR-07100RL, "RES 100 OHM 1% 1/16W 0402", Case Code (Imperial)=0402, Case Code (Metric)=1005, LCSC Part Number=C106232, Manufacturer=Yageo, Max Operating Temperature=155°C, Max Power Dissipation=63mW, Min Operating Temperature=-55°C, Power Rating=62.5mW, Resistance Tolerance=1%, Resistor Type="Thick Film", Supplier Part Number 1=603-RC0402FR-07100RL, Temperature Coefficient=100ppm/°C, Voltage Rating=50V, Case/Package=0402, Category="Chip SMD Resistors", ComponentLink1Description=https://datasheet.ciiva.com/11808/0900766b80c66297-11808765.pdf?src-supplier=RSComponents, ComponentLink1URL=https://datasheet.ciiva.com/11808/0900766b80c66297-11808765.pdf?src-supplier=RSComponents, ComponentLink2Description=https://datasheet.ciiva.com/7849/1784430-7849810.pdf?src-supplier=Element14, ComponentLink2URL=https://datasheet.ciiva.com/7849/1784430-7849810.pdf?src-supplier=Element14, ComponentLink3Description=https://datasheet.ciiva.com/28367/1018594-28367226.pdf?src-supplier=Element14, ComponentLink3URL=https://datasheet.ciiva.com/28367/1018594-28367226.pdf?src-supplier=Element14, ComponentLink4Description=https://datasheet.ciiva.com/22747/1018594-22747511.pdf?src-supplier=Element14, ComponentLink4URL=https://datasheet.ciiva.com/22747/1018594-22747511.pdf?src-supplier=Element14, ComponentLink5Description=https://datasheet.ciiva.com/12667/pyu-rc0402-51-rohs-l-6-r-12667957.pdf?src-supplier=Mouser, ComponentLink5URL=https://datasheet.ciiva.com/12667/pyu-rc0402-51-rohs-l-6-r-12667957.pdf?src-supplier=Mouser, ComponentLink6Description=https://datasheet.ciiva.com/15189/getdatasheetpartid-329466-15189335.pdf?src-supplier=Verical, ComponentLink6URL=https://datasheet.ciiva.com/15189/getdatasheetpartid-329466-15189335.pdf?src-supplier=Verical, ComponentLink7Description=https://datasheet.ciiva.com/16740/pyu-rc0402-51-rohs-l-6-r-16740566.pdf?src-supplier=Future+Electronics, ComponentLink7URL=https://datasheet.ciiva.com/16740/pyu-rc0402-51-rohs-l-6-r-16740566.pdf?src-supplier=Future+Electronics, Construction=Rectangular, Depth=0.5mm, Features="Moisture Resistant", Height=0.32mm, Item Type=Resistor, Lead Free="Lead Free", Length=1mm, Manufacturer Part Number=RC0402FR-07100RL, Military Standard=Not, Number of Pins=2, Number of Terminations=2, Packaging="Tape and Reel", Pricing 1="1=0.10000, 10=0.01200, 50=0.01200, 100=0.00500, 1000=0.00300, 2500=0.00200, 10000=0.00100 (USD)", REACH SVHC="No SVHC", Resistance=100R, RoHS=Yes, RoHS Compliant=Yes, Series=RC, Size Code=0402, Stock 1=699545, Supplier 1=Mouser, Technology="THICK FILM", Termination=SMD/SMT, Tolerance=1%, Voltage Rating (DC)=50V, Width=0.5mm
TP1 TP2 TP3 TP4 TP5: "Test Point ON", Item Type="TEST POINT"
U1: "IC REG BCK SPLIT RAIL ADJ 8SOPWR", LCSC Part Number=C2072188, Manufacturer="Texas Instruments", Max Supply Voltage=60V, Min Supply Voltage=4.5V, Nominal Supply Current=146uA, Supplier Part Number=595-TPS54560BQDDARQ1, ComponentLink1Description=http://www.ti.com/lit/ds/symlink/tps54560b-q1.pdf?src-supplier=Digikey, ComponentLink1URL=http://www.ti.com/lit/ds/symlink/tps54560b-q1.pdf?src-supplier=Digikey, Height=1.7mm, Item Type=IC, Length=4.89mm, Manufacturer Part Number=TPS54560BQDDARQ1, Pricing="1=6.41, 10=5.44, 50=5.44, 100=4.7, 1000=3.4, 10000=3.29 (USD)", RoHS=Yes, Stock=1171, Supplier=Mouser, Thickness=1.48mm, Width=3.9mm
U2: "IC REG LINEAR 5V 1A DPAK", LCSC Part Number=C110908, Manufacturer=onsemi, Package=TO-252-2(DPAK), ComponentLink1Description=LCSC, ComponentLink1URL=https://www.lcsc.com/product-detail/Linear-Voltage-Regulators-LDO_onsemi-MC7805BDTRKG_C110908.html, Item Type=Regulator, Manufacturer Part Number=MC7805BDTRKG
U4: "IC REG LINEAR 3.3V 1.2A SOT223", Case/Package=TO-261-4, Dropout Voltage=600mV, LCSC Part Number=C435835, Manufacturer=STMicroelectronics, Max Input Voltage=18V, Max Operating Temperature=125°C, Min Operating Temperature=-40°C, Min Output Voltage=3.3V, Output Current=1.2A, Power Supply Rejection Ratio (PSRR)=65dB, Quiescent Current=500uA, Supplier Part Number 1=497-17239-6-ND, ComponentLink1Description=LCSC, ComponentLink1URL=https://www.lcsc.com/product-detail/Linear-Voltage-Regulators-LDO_STMicroelectronics-LDL1117S33R_C435835.html, Item Type=IC, Manufacturer Part Number=LDL1117S33R, Mount="Surface Mount", Number of Regulators=1, Output Configuration=Positive, Output Type=Fixed, Packaging="Tape and Reel", Pricing 1="1=0.45, 10=0.362, 100=0.2465, 500=0.1849, 1000=0.13867 (USD)", Stock 1=13064, Supplier 1=Digi-Key

## Free pads (board coordinates)
  round 0 hole 3 unplated: MH1(32.92,-18.055) MH2(-12.718,-18.055) MH3(40.845,-63) MH4(-20.643,-63)

## Via types
v1: diameter 0.6, hole 0.3, Top Layer to Bottom Layer, 103 vias

## Nets (pads, with @x,y where several pads share a name; then routed paths per layer and width w, separated by ;. In a path a pad name is that pad's centre, name@x,y a point inside that pad or via, vN(x,y) a via of type N, cw(c..) or ccw(c..) an arc to the next point about the centre after c; other vN are vias at no path point)
+3V3: C8.1 D10.2 J3.4 LED3.1 TP4.1 U4.2 U4.4 | length 26.4
  Top Layer w0.305: TP4.1 LED3.1 -27.635,-36.116 -26.614,-35.094 -19.755,-35.094 -17.919,-33.257
  other v1: -17.221,-18.314 -16.316,-17.408 -15.367,-16.459 -14.393,-15.485 -13.434,-14.526 -12.475,-13.567
+5V: C3.1 C19.2 J3.3 LED2.1 TP3.1 U2.3 U4.3 | length 7.9
  Top Layer w0.305: 7.95,-70.366 TP3.1 LED2.1
  other v1: -0.377,-77.175 1.528,-77.175 -0.377,-75.79 1.528,-75.79 -0.377,-74.406 1.528,-74.406 -18.339,-47.066 -16.891,-47.066 -18.339,-45.618 -16.891,-45.618 1.04,-29.036 0.428,-27.857 -0.218,-26.677 -0.9,-25.537
+12V: C2.1 C9.2 D3.1 J3.1 J3.2 L1.2 LED1.1 R1.2 TP2.1 U2.1 | length 21.2
  Top Layer w0.254: R1.2 32.667,-42.658 33.814,-42.658 35.401,-41.072 35.839,-41.072 ; v1@46.189,-42.786 v1(46.189,-42.579)
  Top Layer w0.305: TP2.1 LED1.1 47.84,-43.267 46.11,-41.536 46.11,-39.691 47.003,-38.798
  other v1: 24.607,-72.807 25.984,-72.807 24.607,-71.43 25.984,-71.43 24.607,-70.053 25.984,-70.053 40.26,-47.177 41.228,-46.411 42.236,-45.645 43.204,-44.878 44.213,-44.112 45.181,-43.345 47.157,-41.813 48.125,-41.046
FB: R1.1 R3.2 U1.5 | length 3.1
  Top Layer w0.254: U1.5 30.066,-38.148 30.588,-38.77 R3.2 30.486,-38.992 29.884,-39.515 R1.1
GND: C2.2 C3.2 C4.1 C5.1 C6.1 C7.1 C8.2 C9.1 C19.1 D1.1 D2.1 D3.2 D10.1 J1.2 J3.5 J3.6 R3.1 R4.1 R5.2 R6.2 R7.2 TP5.1 U1.7 U1.9 U2.2 U4.1 | length 6.3
  Top Layer w0.254: TP5.1 4.501,-19.482 ; R4.1 25.739,-35.086 26.533,-35.086 27.49,-34.129 v1(27.659,-34.129) ; R3.1 31.254,-39.577 31.969,-40.292 v1(31.969,-40.294)
  other v1: 3.884,-82.936 5.621,-82.936 7.359,-82.936 9.097,-82.936 10.834,-82.936 12.572,-82.936 14.309,-82.936 3.884,-81.198 3.884,-79.461 3.884,-77.723 11.506,-68.74 -27.635,-54.559 47.84,-54.559 33.872,-50.628 34.881,-49.861 32.685,-49.14 35.849,-49.095 33.693,-48.374 34.661,-47.607 30.349,-46.164 31.317,-45.398 32.325,-44.631 -15.94,-43.637 -14.402,-43.637 -15.94,-42.342 -23.647,-41.044 -22.073,-41.044 -17.755,-41.044 -23.647,-39.649 -22.073,-39.649 -17.755,-39.649 33.463,-38.548 -22.073,-38.254 -17.755,-38.254 28.663,-35.323 29.032,-33.993 30.406,-33.857 29.401,-32.663 23.57,-31.915 22.855,-31.072 -10.033,-31.013 22.124,-30.133 -10.645,-29.834 31.565,-29.672 21.408,-29.29 32.533,-28.905 -11.291,-28.655 20.693,-28.448 33.541,-28.139 21.622,-27.742 -11.973,-27.514 -12.585,-26.335 -13.231,-25.156 -13.914,-24.015 4.706,-20 4.706,-18.567 6.02,-18.567 7.334,-18.567 8.648,-18.567
NetC1_1: C1.1 D2.2 L1.1 U1.8 | length 8.8
  Top Layer w0.254: C1.1 30.069,-28.898 v1(30.568,-28.479) ; v1(34.092,-25.522) 35.647,-27.376 D2.2@36.082,-27.816 ; D2.2@36.003,-27.874 D2.2@36.225,-28.178
  Bottom Layer w0.254: v1(30.568,-28.479) v1(34.092,-25.522)
NetC1_2: C1.2 U1.1 | length 1.2
  Top Layer w0.254: U1.1@28.312,-30.338 C1.2@29.177,-29.613 ; U1.1@28.439,-30.298 U1.1@28.522,-30.23
NetC4_2: C4.2 R2.2 U1.6
NetC7_2: C7.2 R2.1
NetF1_1: F1.1 J1.1
  other v1: 15.496,-20 11.553,-18.567 12.868,-18.567 14.182,-18.567 15.496,-18.567
NetLED1_2: LED1.2 R5.1 | length 1.7
  Top Layer w0.254: R5.1 LED1.2
NetLED2_2: LED2.2 R6.1 | length 1.7
  Top Layer w0.254: R6.1 LED2.2
NetLED3_2: LED3.2 R7.1 | length 1.7
  Top Layer w0.254: R7.1 LED3.2
NetR4_2: R4.2 U1.4 | length 1.4
  Top Layer w0.254: R4.2 24.812,-33.777 25.629,-33.092 U1.4
VS: C5.2 C6.2 D1.2 F1.2 TP1.1 U1.2 | length 3.5
  Top Layer w0.254: 17.952,-22.936 TP1.1
pads on no net: J1.S1 J1.S2 U1.3

## Polygon pours and split planes (outlines as drawn)
GND on Top Layer "NONET_L-01_P-001" (solid, remove dead copper, pour order 10): -17.293,-16.446 ccw(c10.101,-45.25) 37.495,-16.446 20.202,0 0,0
VS on Top Layer "NONET_L-01_P-001" (solid, pour order 0): 24.285,-21.165 29.895,-27.616 27.239,-29.834 28.88,-31.773 27.971,-32.576 26.348,-30.725 25.597,-30.679 23.306,-27.873 ccw(c14.56,-38.172) 14.296,-24.663 8.36,-24.663 8.36,-21.165
+3V3 on Top Layer "NONET_L-01_P-001" (solid, pour order 8): -28.454,-35.575 cw(c10.101,-45.25) -17.293,-16.446 -11.557,-10.991 -3.752,-10.991 -11.399,-18.638 ccw(c2.329,-36.891) -20.472,-35.575
+5V on Top Layer "NONET_L-01_P-001" (solid, pour order 4): -6.887,-39.268 -6.894,-47.676 -12.126,-47.676 -12.159,-39.268 cw(c10.006,-45.022) -0.597,-24.724 1.764,-29.266 ccw(c10.066,-45.155) -6.867,-39.268
NetC1_1 on Top Layer "NONET_L-01_P-001" (solid, pour order 1): 31.27,-34.426 32.698,-36.204 34.488,-38.412 43.764,-30.683 38.671,-24.415 35.318,-27.307 37.442,-29.8 37.023,-30.642 33.009,-33.836 31.817,-33.968
GND on Bottom Layer "NONET_L-01_P-001" (solid, pour order 11): -17.293,-16.446 ccw(c10.101,-45.25) 37.495,-16.446 20.202,0 0,0
+5V on Bottom Layer "NONET_L-01_P-001" (solid, pour order 9): 5.507,-28.105 3.308,-28.851 ccw(c4.252,-31.738) 2.763,-29.091 ccw(c3.71,-31.928) 2.227,-29.331 ccw(c3.356,-32.075) 1.713,-29.604 ccw(c2.975,-32.223) 1.226,-29.9 -1.363,-31.478 -1.363,-23.089 2.184,-21.057 5.507,-21.057
+12V on Bottom Layer "NONET_L-01_P-001" (solid, pour order 5): 48.536,-35.11 49.86,-41.886 49.802,-49.49 48.623,-55.221 47.495,-58.951 45.984,-62.452 43.808,-66.333 42.463,-68.334 40.758,-70.608 37.866,-73.822 34.064,-76.965 30.018,-79.65 25.665,-81.826 21.165,-83.429 17.846,-72.266 ccw(c10.734,-45.961) 30.353,-27.051 21.768,-27.051 21.768,-2.184 22.499,-2.184 32.645,-11.834 38.58,-17.479 41.122,-20.312 44.444,-25.103 46.797,-29.828
+3V3 on Bottom Layer "NONET_L-01_P-001" (solid, pour order 6): 21.311,-23.038 21.311,-0.483 0.151,-0.483 -19.941,-19.66 -12.319,-19.66 1.905,-5.436 16.358,-5.436 17.729,-6.807 17.729,-22.047 16.739,-23.038
+5V on Bottom Layer "NONET_L-01_P-001" (solid, pour order 3): 1.093,-83.533 cw(c10.12,-45.248) -29.214,-45.107 -19.812,-45.107 ccw(c14.294,-41.731) 3.697,-74.324

## Other copper
Top Layer:
  rectangle net +12V: 13.905,-73.366 26.848,-69.494
  rectangle net +5V: -1.067,-77.886 2.7,-69.494
  rectangle net +3V3: -14.39,-41.032 -12.878,-31.898
  rectangle net +5V: -19.025,-47.676 -8.788,-45.112
  rectangle net +5V: -13.259,-42.786 -8.788,-41.897
  rectangle net +5V: -12.126,-47.676 -8.788,-39.141
  rectangle net +5V: -1.067,-73.366 10.935,-69.494
  region net +12V: 47.814,-42.011 49.48,-41.721 48.546,-36.346 46.88,-36.636
  region net +12V: 47.003,-38.798 38.382,-46.03 40.84,-48.96 49.461,-41.728
  region net +12V: 40.84,-48.96 44.56,-45.819 38.064,-38.127 34.345,-41.268
  rectangle net +3V3: -27.102,-35.578 -11.74,-31.814
  region net NetC7_2: 33.064,-39.222 32.585,-39.638 33.617,-40.826 34.096,-40.409
  region net NetC4_2: 32.269,-39.274 32.757,-38.868 29.976,-35.521 29.488,-35.927
  region net +12V: 48.789,-39.036 46.716,-36.565 37.14,-44.599 39.213,-47.07
  region net +12V: 37.787,-45.372 48.546,-36.346 45.103,-32.242 34.345,-41.268
  rectangle net GND: 3.671,-20.676 10.058,-10.77
  rectangle net NetF1_1: 10.553,-20.676 16.865,-10.77
  pour cut-out: 28.639,-36.35 31.06,-39.121 31.92,-38.408 29.52,-35.617
  pour cut-out: 24.531,-34.898 25.661,-36.191 27.528,-34.642 26.407,-33.338
  pour cut-out: 24.849,-31.979 26.618,-34.003 27.377,-33.372 25.625,-31.334
  pour cut-out: 29.29,-28.099 30.38,-29.346 31.252,-28.623 30.171,-27.366
  pour cut-out: -28.389,-48.928 -28.389,-53.073 -26.881,-53.073 -26.881,-48.928
  pour cut-out: 47.086,-48.928 47.086,-53.073 48.594,-53.073 48.594,-48.928
  pour cut-out: 9.381,-64.126 9.381,-68.27 10.889,-68.27 10.889,-64.126
  pour cut-out: -16.197,-31.555 -12.344,-31.547 -8.986,-31.555 -11.416,-35.837 -16.197,-35.837
  pour cut-out: 34.39,-38.728 35.48,-39.975 45.259,-31.862 44.167,-30.592
Bottom Layer:
  region net GND: 31.075,-30.987 34.35,-28.479 33.423,-27.269 30.148,-29.777
  rectangle net +3V3: 11.801,-23.038 20.168,-21.057
  rectangle net +12V: 6.401,-27.051 23.012,-23.555
  rectangle net +5V: 2.54,-23.038 8.401,-21.057
  rectangle net +5V: -28.981,-47.674 -16.284,-45.107

## Silkscreen, mask and mechanical layers (free items; w line width, h text height)
Top Overlay:
  lines w0.127: 31.455,-39.816 31.455,-40.445 30.359,-41.541 30.359,-42.2 ; 32.51,-41.333 32.289,-41.333 32.511,-41.554 ; 32.512,-41.333 32.733,-41.333 32.511,-41.554 ; 32.876,-40.109 32.511,-40.474 32.511,-41.554 ; 30.359,-42.2 30.115,-41.956 30.359,-41.956 30.603,-41.956 30.359,-42.2
  text "GND" at -1.457,-19.946 h1.02
  text "VS" at 18.973,-19.946 h1.02
  text "3V3" at -24.422,-49.889 h1.02
  text "12V" at 41.745,-49.893 h1.02
  text "5V" at 4.047,-65.09 h1.02
Mechanical 2:
  circle w0.013: c40.845,-63 r1.5
  circle w0.013: c10.101,-45.25 r17.75
  circle w0.013: c32.92,-18.055 r1.5
  circle w0.013: c-20.643,-63 r1.5
  circle w0.013: c-12.718,-18.055 r1.5
  lines w0.254: -17.293,-16.446 ccw(c10.101,-45.25) 37.495,-16.446 20.202,0 0,0 -17.293,-16.446